# Altium PCB Main.PcbDoc (part 3 of 4)
Units mil, origin at the board's own origin, x right, y up, seen from the top; angles counter-clockwise.
Board outline 16000 x 4900 mil, 4 copper layers (L1-Top, L2-Mid-A, L3-Mid-B, L4-Bottom), stack 285.556 mil thick; 96 components, 105 nets, 278 pads, 8355 vias.
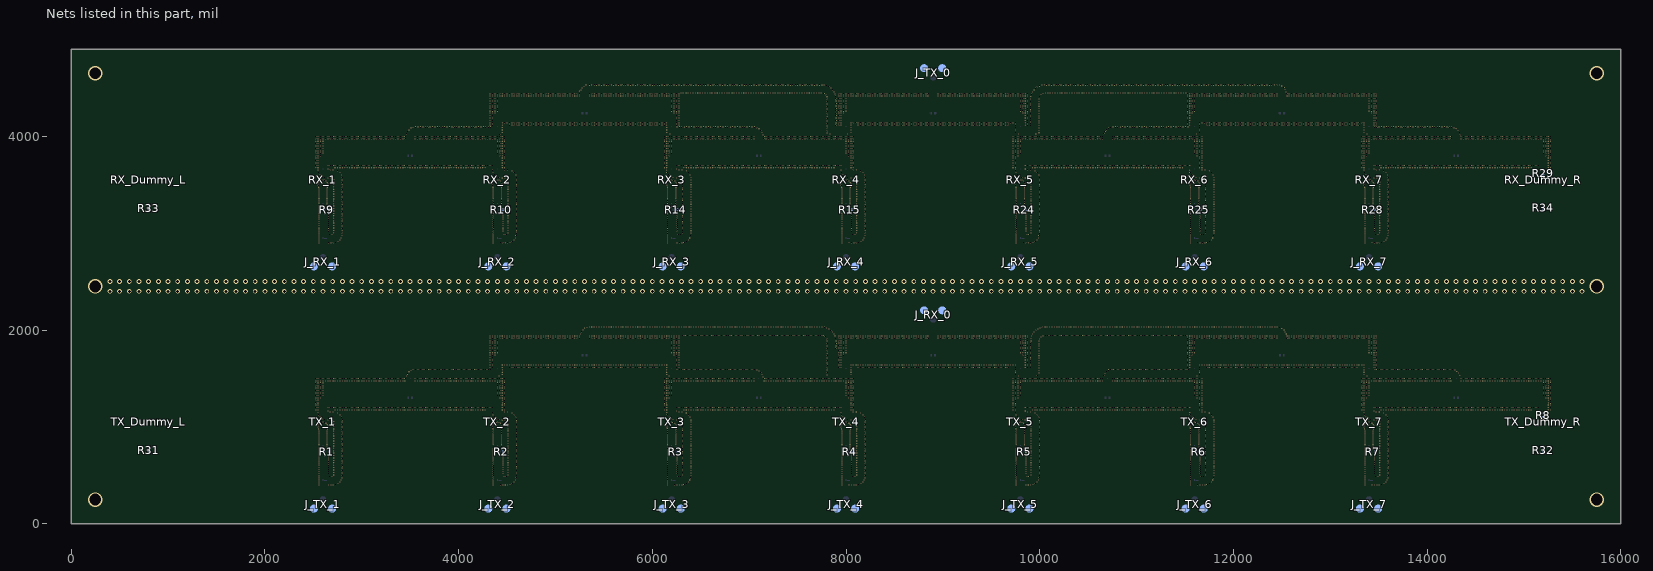
[diagram p5: the nets of this part, all layers, seen from the top]

## Via types
v1: diameter 12, hole 6, L3-Mid-B to L4-Bottom, tented both sides, 5944 vias
v2: diameter 12, hole 6, L3-Mid-B to L4-Bottom, tented bottom, 2081 vias
v3: diameter 50, hole 31, L1-Top to L4-Bottom, tented both sides, 306 vias
v4: diameter 39.37/55.12/55.12 (per signal layer), hole 35.43, L2-Mid-A to L4-Bottom, 18 vias
v5: diameter 150, hole 120, L1-Top to L4-Bottom, 6 vias

## Nets (pads, with @x,y where several pads share a name; then routed paths per layer and width w, separated by ;. In a path a pad name is that pad's centre, name@x,y a point inside that pad or via, vN(x,y) a via of type N, cw(c..) or ccw(c..) an arc to the next point about the centre after c; other vN are vias at no path point) (continued)
GND: (continued)
  other v1: 2525,4000 2550,4000 2575,4000 2600,4000 2625,4000 2650,4000 2675,4000 2700,4000 2725,4000 2750,4000 2775,4000 2800,4000 2825,4000 2850,4000 2875,4000 2900,4000 2925,4000 2950,4000 2975,4000 3000,4000 3025,4000 3050,4000 3075,4000 3100,4000 3125,4000 3150,4000 3175,4000 3200,4000 3225,4000 3250,4000 3275,4000 3300,4000 3325,4000 3350,4000 3375,4000 3400,4000 3425,4000 3450,4000 3550,4000 3575,4000 3600,4000 3625,4000 3650,4000 3675,4000 3700,4000 3725,4000 3750,4000 3775,4000 3800,4000 3825,4000 3850,4000 3875,4000 3900,4000 3925,4000 3950,4000 3975,4000 4000,4000 4025,4000 4050,4000 4075,4000 4100,4000 4125,4000 4150,4000 4175,4000 4200,4000 4225,4000 4250,4000 4275,4000 4300,4000 4325,4000 4350,4000 4375,4000 4400,4000 4425,4000 4450,4000 4475,4000 6125,4000 6150,4000 6175,4000 6200,4000 6225,4000 6250,4000 6275,4000 6300,4000 6325,4000 6350,4000 6375,4000 6400,4000 6425,4000 6450,4000 6475,4000 6500,4000 6525,4000 6550,4000 6575,4000 6600,4000 6625,4000 6650,4000 6675,4000 6700,4000 6725,4000 6750,4000 6775,4000 6800,4000 6825,4000 6850,4000 6875,4000 6900,4000 6925,4000 6950,4000 6975,4000 7000,4000 7025,4000 7050,4000 7150,4000 7175,4000 7200,4000 7225,4000 7250,4000 7275,4000 7300,4000 7325,4000 7350,4000 7375,4000 7400,4000 7425,4000 7450,4000 7475,4000 7500,4000 7525,4000 7550,4000 7575,4000 7600,4000 7625,4000 7650,4000 7675,4000 7700,4000 7725,4000 7750,4000 7775,4000 7800,4000 7825,4000 7850,4000 7875,4000 7900,4000 7925,4000 7950,4000 7975,4000 8000,4000 8025,4000 8050,4000 8075,4000 9725,4000 9750,4000 9775,4000 9800,4000 9825,4000 9850,4000 9875,4000 9900,4000 9925,4000 9950,4000 9975,4000 10000,4000 10025,4000 10050,4000 10075,4000 10100,4000 10125,4000 10150,4000 10175,4000 10200,4000 10225,4000 10250,4000 10275,4000 10300,4000 10325,4000 10350,4000 10375,4000 10400,4000 10425,4000 10450,4000 10475,4000 10500,4000 10525,4000 10550,4000 10575,4000 10600,4000 10625,4000 10650,4000 10750,4000 10775,4000 10800,4000 10825,4000 10850,4000 10875,4000 10900,4000 10925,4000 10950,4000 10975,4000 11000,4000 11025,4000 11050,4000 11075,4000 11100,4000 11125,4000 11150,4000 11175,4000 11200,4000 11225,4000 11250,4000 11275,4000 11300,4000 11325,4000 11350,4000 11375,4000 11400,4000 11425,4000 11450,4000 11475,4000 11500,4000 11525,4000 11550,4000 11575,4000 11600,4000 11625,4000 11650,4000 11675,4000 13325,4000 13350,4000 13375,4000 13400,4000 13425,4000 13450,4000 13475,4000 13500,4000 13525,4000 13550,4000 13575,4000 13600,4000 13625,4000 13650,4000 13675,4000 13700,4000 13725,4000 13750,4000 13775,4000 13800,4000 13825,4000 13850,4000 13875,4000 13900,4000 13925,4000 13950,4000 13975,4000 14000,4000 14025,4000 14050,4000 14075,4000 14100,4000 14125,4000 14150,4000 14175,4000 14200,4000 14225,4000 14250,4000 14350,4000 14375,4000 14400,4000 14425,4000 14450,4000 14475,4000 14500,4000 14525,4000 14550,4000 14575,4000 14600,4000 14625,4000 14650,4000 14675,4000 14700,4000 14725,4000 14750,4000 14775,4000 14800,4000 14825,4000 14850,4000 14875,4000 14900,4000 14925,4000 14950,4000 14975,4000 15000,4000 15025,4000 15050,4000 15075,4000 15100,4000 15125,4000 15150,4000 15175,4000 15200,4000 15225,4000 15250,4000 15275,4000 4425,4020 6180,4025 8015,4025 9780,4025 11620,4025 13380,4025 4450,4040 6150,4040 8050,4040 9750,4040 11650,4040 13350,4040 4450,4065 6150,4065 8050,4065 9750,4065 11650,4065 13350,4065 4450,4090 6150,4090 8050,4090 9750,4090 11650,4090 13350,4090 4325,4115 4350,4115 4450,4115 4525,4115 4550,4115 4575,4115 4600,4115 4625,4115 4650,4115 4675,4115 4700,4115 4725,4115 4750,4115 4775,4115 4800,4115 4825,4115 4850,4115 4875,4115 4900,4115 4925,4115 4950,4115 4975,4115 5000,4115 5025,4115 5050,4115 5075,4115 5100,4115 5125,4115 5150,4115 5175,4115 5200,4115 5225,4115 5250,4115 5275,4115 5300,4115 5325,4115 5350,4115 5375,4115 5400,4115 5425,4115 5450,4115 5475,4115 5500,4115 5525,4115 5550,4115 5575,4115 5600,4115 5625,4115 5650,4115 5675,4115 5700,4115 5725,4115 5750,4115 5775,4115 5800,4115 5825,4115 5850,4115 5875,4115 5900,4115 5925,4115 5950,4115 5975,4115 6000,4115 6025,4115 6050,4115 6075,4115 6100,4115 6125,4115 6150,4115 6250,4115 6275,4115 7925,4115 7950,4115 8050,4115 8125,4115 8150,4115 8175,4115 8200,4115 8225,4115 8250,4115 8275,4115 8300,4115 8325,4115 8350,4115 8375,4115 8400,4115 8425,4115 8450,4115 8475,4115 8500,4115 8525,4115 8550,4115 8575,4115 8600,4115 8625,4115 8650,4115 8675,4115 8700,4115 8725,4115 8750,4115 8775,4115 8800,4115 8825,4115 8850,4115 8875,4115 8900,4115 8925,4115 8950,4115 8975,4115 9000,4115 9025,4115 9050,4115 9075,4115 9100,4115 9125,4115 9150,4115 9175,4115 9200,4115 9225,4115 9250,4115 9275,4115 9300,4115 9325,4115 9350,4115 9375,4115 9400,4115 9425,4115 9450,4115 9475,4115 9500,4115 9525,4115 9550,4115 9575,4115 9600,4115 9625,4115 9650,4115 9675,4115 9750,4115 9850,4115 9875,4115 11525,4115 11550,4115 11650,4115 11725,4115 11750,4115 11775,4115 11800,4115 11825,4115 11850,4115 11875,4115 11900,4115 11925,4115 11950,4115 11975,4115 12000,4115 12025,4115 12050,4115 12075,4115 12100,4115 12125,4115 12150,4115 12175,4115 12200,4115 12225,4115 12250,4115 12275,4115 12300,4115 12325,4115 12350,4115 12375,4115 12400,4115 12425,4115 12450,4115 12475,4115 12500,4115 12525,4115 12550,4115 12575,4115 12600,4115 12625,4115 12650,4115 12675,4115 12700,4115 12725,4115 12750,4115 12775,4115 12800,4115 12825,4115 12850,4115 12875,4115 12900,4115 12925,4115 12950,4115 12975,4115 13000,4115 13025,4115 13050,4115 13075,4115 13100,4115 13125,4115 13150,4115 13175,4115 13200,4115 13225,4115 13250,4115 13275,4115 13300,4115 13350,4115 13450,4115 13475,4115 4325,4140 4350,4140 4450,4140 4475,4140 4500,4140 4525,4140 4550,4140 4575,4140 4600,4140 4625,4140 4650,4140 4675,4140 4700,4140 4725,4140 4750,4140 4775,4140 4800,4140 4825,4140 4850,4140 4875,4140 4900,4140 4925,4140 4950,4140 4975,4140 5000,4140 5025,4140 5050,4140 5075,4140 5100,4140 5125,4140 5150,4140 5175,4140 5200,4140 5225,4140 5250,4140 5275,4140 5300,4140 5325,4140 5350,4140 5375,4140 5400,4140 5425,4140 5450,4140 5475,4140 5500,4140 5525,4140 5550,4140 5575,4140 5600,4140 5625,4140 5650,4140 5675,4140 5700,4140 5725,4140 5750,4140 5775,4140 5800,4140 5825,4140 5850,4140 5875,4140 5900,4140 5925,4140 5950,4140 5975,4140 6000,4140 6025,4140 6050,4140 6075,4140 6100,4140 6125,4140 6150,4140 6250,4140 6275,4140 7925,4140 7950,4140 8050,4140 8075,4140 8100,4140 8125,4140 8150,4140 8175,4140 8200,4140 8225,4140 8250,4140 8275,4140 8300,4140 8325,4140 8350,4140 8375,4140 8400,4140 8425,4140 8450,4140 8475,4140 8500,4140 8525,4140 8550,4140 8575,4140 8600,4140 8625,4140 8650,4140 8675,4140 8700,4140 8725,4140 8750,4140 8775,4140 8800,4140 8825,4140 8850,4140 8875,4140 8900,4140 8925,4140 8950,4140 8975,4140 9000,4140 9025,4140 9050,4140 9075,4140 9100,4140 9125,4140 9150,4140 9175,4140 9200,4140 9225,4140 9250,4140 9275,4140 9300,4140 9325,4140 9350,4140 9375,4140 9400,4140 9425,4140 9450,4140 9475,4140 9500,4140 9525,4140 9550,4140 9575,4140 9600,4140 9625,4140 9650,4140 9675,4140 9700,4140 9725,4140 9750,4140 9850,4140 9875,4140 11525,4140 11550,4140 11650,4140 11675,4140 11700,4140 11725,4140 11750,4140 11775,4140 11800,4140 11825,4140 11850,4140 11875,4140 11900,4140 11925,4140 11950,4140 11975,4140 12000,4140 12025,4140 12050,4140 12075,4140 12100,4140 12125,4140 12150,4140 12175,4140 12200,4140 12225,4140 12250,4140 12275,4140 12300,4140 12325,4140 12350,4140 12375,4140 12400,4140 12425,4140 12450,4140 12475,4140 12500,4140 12525,4140 12550,4140 12575,4140 12600,4140 12625,4140 12650,4140 12675,4140 12700,4140 12725,4140 12750,4140 12775,4140 12800,4140 12825,4140 12850,4140 12875,4140 12900,4140 12925,4140 12950,4140 12975,4140 13000,4140 13025,4140 13050,4140 13075,4140 13100,4140 13125,4140 13150,4140 13175,4140 13200,4140 13225,4140 13250,4140 13275,4140 13300,4140 13325,4140 13350,4140 13450,4140 13475,4140 4325,4165 4350,4165 6250,4165 6275,4165 7925,4165 7950,4165 9850,4165 9875,4165 11525,4165 11550,4165 13450,4165 13475,4165 4325,4190 4350,4190 6250,4190 6275,4190 7925,4190 7950,4190 9850,4190 9875,4190 11525,4190 11550,4190 13450,4190 13475,4190 4325,4215 4350,4215 6250,4215 6275,4215 7925,4215 7950,4215 9850,4215 9875,4215 11525,4215 11550,4215 13450,4215 13475,4215 4325,4240 4350,4240 4375,4240 6225,4240 6250,4240 6275,4240 7925,4240 7950,4240 7975,4240 9825,4240 9850,4240 9875,4240 11525,4240 11550,4240 11575,4240 13425,4240 13450,4240 13475,4240 4325,4265 4350,4265 4375,4265 4400,4265 6200,4265 6225,4265 6250,4265 6275,4265 7925,4265 7950,4265 7975,4265 8000,4265 9800,4265 9825,4265 9850,4265 9875,4265 11525,4265 11550,4265 11575,4265 11600,4265 13400,4265 13425,4265 13450,4265 13475,4265 4325,4290 4350,4290 4375,4290 4400,4290 6200,4290 6225,4290 6250,4290 6275,4290 7925,4290 7950,4290 7975,4290 8000,4290 9800,4290 9825,4290 9850,4290 9875,4290 11525,4290 11550,4290 11575,4290 11600,4290 13400,4290 13425,4290 13450,4290 13475,4290 4325,4315 4350,4315 4375,4315 4400,4315 6200,4315 6225,4315 6250,4315 6275,4315 7925,4315 7950,4315 7975,4315 8000,4315 9800,4315 9825,4315 9850,4315 9875,4315 11525,4315 11550,4315 11575,4315 11600,4315 13400,4315 13425,4315 13450,4315 13475,4315 4325,4340 4350,4340 4375,4340 4400,4340 6200,4340 6225,4340 6250,4340 6275,4340 7925,4340 7950,4340 7975,4340 8000,4340 9800,4340 9825,4340 9850,4340 9875,4340 11525,4340 11550,4340 11575,4340 11600,4340 13400,4340 13425,4340 13450,4340 13475,4340 4325,4365 4350,4365 4375,4365 4400,4365 6200,4365 6225,4365 6250,4365 6275,4365 7925,4365 7950,4365 7975,4365 8000,4365 9800,4365 9825,4365 9850,4365 9875,4365 11525,4365 11550,4365 11575,4365 11600,4365 13400,4365 13425,4365 13450,4365 13475,4365 4325,4390 4350,4390 4375,4390 4400,4390 6200,4390 6225,4390 6250,4390 6275,4390 7925,4390 7950,4390 7975,4390 8000,4390 9800,4390 9825,4390 9850,4390 9875,4390 11525,4390 11550,4390 11575,4390 11600,4390 13400,4390 13425,4390 13450,4390 13475,4390 4325,4415 4350,4415 4375,4415 4400,4415 4425,4415 4450,4415 4475,4415 4500,4415 4525,4415 4550,4415 4575,4415 4600,4415 4625,4415 4650,4415 4675,4415 4700,4415 4725,4415 4750,4415 4775,4415 4800,4415 4825,4415 4850,4415 4875,4415 4900,4415 4925,4415 4950,4415 4975,4415 5000,4415 5025,4415 5050,4415 5075,4415 5100,4415 5125,4415 5150,4415 5175,4415 5200,4415 5225,4415 5250,4415 5350,4415 5375,4415 5400,4415 5425,4415 5450,4415 5475,4415 5500,4415 5525,4415 5550,4415 5575,4415 5600,4415 5625,4415 5650,4415 5675,4415 5700,4415 5725,4415 5750,4415 5775,4415 5800,4415 5825,4415 5850,4415 5875,4415 5900,4415 5925,4415 5950,4415 5975,4415 6000,4415 6025,4415 6050,4415 6075,4415 6100,4415 6125,4415 6150,4415 6175,4415 6200,4415 6225,4415 6250,4415 6275,4415 7925,4415 7950,4415 7975,4415 8000,4415 8025,4415 8050,4415 8075,4415 8100,4415 8125,4415 8150,4415 8175,4415 8200,4415 8225,4415 8250,4415 8275,4415 8300,4415 8325,4415 8350,4415 8375,4415 8400,4415 8425,4415 8450,4415 8475,4415 8500,4415 8525,4415 8550,4415 8575,4415 8600,4415 8625,4415 8650,4415 8675,4415 8700,4415 8725,4415 8750,4415 8775,4415 8800,4415 8825,4415 8850,4415 8950,4415 8975,4415 9000,4415 9025,4415 9050,4415 9075,4415 9100,4415 9125,4415 9150,4415 9175,4415 9200,4415 9225,4415 9250,4415 9275,4415 9300,4415 9325,4415 9350,4415 9375,4415 9400,4415 9425,4415 9450,4415 9475,4415 9500,4415 9525,4415 9550,4415 9575,4415 9600,4415 9625,4415 9650,4415 9675,4415 9700,4415 9725,4415 9750,4415 9775,4415 9800,4415 9825,4415 9850,4415 9875,4415 11525,4415 11550,4415 11575,4415 11600,4415 11625,4415 11650,4415 11675,4415 11700,4415 11725,4415 11750,4415 11775,4415 11800,4415 11825,4415 11850,4415 11875,4415 11900,4415 11925,4415 11950,4415 11975,4415 12000,4415 12025,4415 12050,4415 12075,4415 12100,4415 12125,4415 12150,4415 12175,4415 12200,4415 12225,4415 12250,4415 12275,4415 12300,4415 12325,4415 12350,4415 12375,4415 12400,4415 12425,4415 12450,4415 12550,4415 12575,4415 12600,4415 12625,4415 12650,4415 12675,4415 12700,4415 12725,4415 12750,4415 12775,4415 12800,4415 12825,4415 12850,4415 12875,4415 12900,4415 12925,4415 12950,4415 12975,4415 13000,4415 13025,4415 13050,4415 13075,4415 13100,4415 13125,4415 13150,4415 13175,4415 13200,4415 13225,4415 13250,4415 13275,4415 13300,4415 13325,4415 13350,4415 13375,4415 13400,4415 13425,4415 13450,4415 13475,4415 4325,4440 4350,4440 4375,4440 4400,4440 4425,4440 4450,4440 4475,4440 4500,4440 4525,4440 4550,4440 4575,4440 4600,4440 4625,4440 4650,4440 4675,4440 4700,4440 4725,4440 4750,4440 4775,4440 4800,4440 4825,4440 4850,4440 4875,4440 4900,4440 4925,4440 4950,4440 4975,4440 5000,4440 5025,4440 5050,4440 5075,4440 5100,4440 5125,4440 5150,4440 5175,4440 5200,4440 5225,4440 5250,4440 5350,4440 5375,4440 5400,4440 5425,4440 5450,4440 5475,4440 5500,4440 5525,4440 5550,4440 5575,4440 5600,4440 5625,4440 5650,4440 5675,4440 5700,4440 5725,4440 5750,4440 5775,4440 5800,4440 5825,4440 5850,4440 5875,4440 5900,4440 5925,4440 5950,4440 5975,4440 6000,4440 6025,4440 6050,4440 6075,4440 6100,4440 6125,4440 6150,4440 6175,4440 6200,4440 6225,4440 6250,4440 6275,4440 7925,4440 7950,4440 7975,4440 8000,4440 8025,4440 8050,4440 8075,4440 8100,4440 8125,4440 8150,4440 8175,4440 8200,4440 8225,4440 8250,4440 8275,4440 8300,4440 8325,4440 8350,4440 8375,4440 8400,4440 8425,4440 8450,4440 8475,4440 8500,4440 8525,4440 8550,4440 8575,4440 8600,4440 8625,4440 8650,4440 8675,4440 8700,4440 8725,4440 8750,4440 8775,4440 8800,4440 8825,4440 8850,4440 8950,4440 8975,4440 9000,4440 9025,4440 9050,4440 9075,4440 9100,4440 9125,4440 9150,4440 9175,4440 9200,4440 9225,4440 9250,4440 9275,4440 9300,4440 9325,4440 9350,4440 9375,4440 9400,4440 9425,4440 9450,4440 9475,4440 9500,4440 9525,4440 9550,4440 9575,4440 9600,4440 9625,4440 9650,4440 9675,4440 9700,4440 9725,4440 9750,4440 9775,4440 9800,4440 9825,4440 9850,4440 9875,4440 11525,4440 11550,4440 11575,4440 11600,4440 11625,4440 11650,4440 11675,4440 11700,4440 11725,4440 11750,4440 11775,4440 11800,4440 11825,4440 11850,4440 11875,4440 11900,4440 11925,4440 11950,4440 11975,4440 12000,4440 12025,4440 12050,4440 12075,4440 12100,4440 12125,4440 12150,4440 12175,4440 12200,4440 12225,4440 12250,4440 12275,4440 12300,4440 12325,4440 12350,4440 12375,4440 12400,4440 12425,4440 12450,4440 12550,4440 12575,4440 12600,4440 12625,4440 12650,4440 12675,4440 12700,4440 12725,4440 12750,4440 12775,4440 12800,4440 12825,4440 12850,4440 12875,4440 12900,4440 12925,4440 12950,4440 12975,4440 13000,4440 13025,4440 13050,4440 13075,4440 13100,4440 13125,4440 13150,4440 13175,4440 13200,4440 13225,4440 13250,4440 13275,4440 13300,4440 13325,4440 13350,4440 13375,4440 13400,4440 13425,4440 13450,4440 13475,4440
  other v2: 2655.93,401.28 2680.93,401.28 2705.93,401.32 4455.93,401.28 4480.93,401.28 4505.93,401.32 6255.93,401.28 6280.93,401.28 6305.93,401.32 8055.93,401.28 8080.93,401.28 8105.93,401.32 9855.93,401.28 9880.93,401.28 9905.93,401.32 11655.93,401.28 11680.93,401.28 11705.93,401.32 13455.93,401.28 13480.93,401.28 13505.93,401.32 4430.97,402.66 6230.97,402.66 8030.97,402.66 11630.97,402.66 13430.97,402.66 2730.65,405.11 4530.65,405.11 6330.65,405.11 8130.65,405.11 9930.65,405.11 11730.65,405.11 13530.65,405.11 2753.55,415.14 4553.55,415.14 6353.55,415.14 8153.55,415.14 9953.55,415.14 11753.55,415.14 13553.55,415.14 2772.96,430.89 4572.96,430.89 6372.96,430.89 8172.96,430.89 9972.96,430.89 11772.96,430.89 13572.96,430.89 2787.49,451.24 4587.49,451.24 6387.49,451.24 8187.49,451.24 9987.49,451.24 11787.49,451.24 13587.49,451.24 2796.1,474.71 4596.1,474.71 6396.1,474.71 8196.1,474.71 9996.1,474.71 11796.1,474.71 13596.1,474.71 2667.59,488.12 2692.59,488.12 4467.59,488.12 4492.59,488.12 6267.59,488.12 6292.59,488.12 8067.59,488.12 8092.59,488.12 9867.59,488.12 9892.59,488.12 11667.59,488.12 11692.59,488.12 13467.59,488.12 13492.59,488.12 2798.42,499.6 4598.42,499.6 6398.42,499.6 8198.42,499.6 9998.42,499.6 11798.42,499.6 13598.42,499.6 2711.58,504.37 4511.58,504.37 6311.58,504.37 8111.58,504.37 9911.58,504.37 11711.58,504.37 13511.58,504.37 2798.42,524.6 4598.42,524.6 6398.42,524.6 8198.42,524.6 9998.42,524.6 11798.42,524.6 13598.42,524.6 2711.58,529.37 4511.58,529.37 6311.58,529.37 8111.58,529.37 9911.58,529.37 11711.58,529.37 13511.58,529.37 2798.42,549.6 4598.42,549.6 6398.42,549.6 8198.42,549.6 9998.42,549.6 11798.42,549.6 13598.42,549.6 2711.58,554.37 4511.58,554.37 6311.58,554.37 8111.58,554.37 9911.58,554.37 11711.58,554.37 13511.58,554.37 2798.42,574.6 4598.42,574.6 6398.42,574.6 8198.42,574.6 9998.42,574.6 11798.42,574.6 13598.42,574.6 2711.58,579.37 4511.58,579.37 6311.58,579.37 8111.58,579.37 9911.58,579.37 11711.58,579.37 13511.58,579.37 2798.42,599.6 4598.42,599.6 6398.42,599.6 8198.42,599.6 9998.42,599.6 11798.42,599.6 13598.42,599.6 2711.58,604.37 4511.58,604.37 6311.58,604.37 8111.58,604.37 9911.58,604.37 11711.58,604.37 13511.58,604.37 2798.42,624.6 4598.42,624.6 6398.42,624.6 8198.42,624.6 9998.42,624.6 11798.42,624.6 13598.42,624.6 2711.58,629.37 4511.58,629.37 6311.58,629.37 8111.58,629.37 9911.58,629.37 11711.58,629.37 13511.58,629.37 2798.42,649.6 4598.42,649.6 6398.42,649.6 8198.42,649.6 9998.42,649.6 11798.42,649.6 13598.42,649.6 2711.58,654.37 4511.58,654.37 6311.58,654.37 8111.58,654.37 9911.58,654.37 11711.58,654.37 13511.58,654.37 2798.42,674.6 4598.42,674.6 6398.42,674.6 8198.42,674.6 9998.42,674.6 11798.42,674.6 13598.42,674.6 2711.58,679.37 4511.58,679.37 6311.58,679.37 8111.58,679.37 9911.58,679.37 11711.58,679.37 13511.58,679.37 2798.42,699.6 4598.42,699.6 6398.42,699.6 8198.42,699.6 9998.42,699.6 11798.42,699.6 13598.42,699.6 2711.58,704.37 4511.58,704.37 6311.58,704.37 8111.58,704.37 9911.58,704.37 11711.58,704.37 13511.58,704.37 2798.42,724.6 4598.42,724.6 6398.42,724.6 8198.42,724.6 9998.42,724.6 11798.42,724.6 13598.42,724.6 2711.58,729.37 4511.58,729.37 6311.58,729.37 8111.58,729.37 9911.58,729.37 11711.58,729.37 13511.58,729.37 2798.42,749.6 4598.42,749.6 6398.42,749.6 8198.42,749.6 9998.42,749.6 11798.42,749.6 13598.42,749.6 2711.58,754.37 4511.58,754.37 6311.58,754.37 8111.58,754.37 9911.58,754.37 11711.58,754.37 13511.58,754.37 2798.42,774.6 4598.42,774.6 6398.42,774.6 8198.42,774.6 9998.42,774.6 11798.42,774.6 13598.42,774.6 2711.58,779.37 4511.58,779.37 6311.58,779.37 8111.58,779.37 9911.58,779.37 11711.58,779.37 13511.58,779.37 2798.42,799.6 4598.42,799.6 6398.42,799.6 8198.42,799.6 9998.42,799.6 11798.42,799.6 13598.42,799.6 2711.58,804.37 4511.58,804.37 6311.58,804.37 8111.58,804.37 9911.58,804.37 11711.58,804.37 13511.58,804.37 2798.42,824.6 4598.42,824.6 6398.42,824.6 8198.42,824.6 9998.42,824.6 11798.42,824.6 13598.42,824.6 2711.58,829.37 4511.58,829.37 6311.58,829.37 8111.58,829.37 9911.58,829.37 11711.58,829.37 13511.58,829.37 2798.42,849.6 4598.42,849.6 6398.42,849.6 8198.42,849.6 9998.42,849.6 11798.42,849.6 13598.42,849.6 2711.58,854.37 4511.58,854.37 6311.58,854.37 8111.58,854.37 9911.58,854.37 11711.58,854.37 13511.58,854.37 2798.42,874.6 4598.42,874.6 6398.42,874.6 8198.42,874.6 9998.42,874.6 11798.42,874.6 13598.42,874.6 2711.58,879.37 4511.58,879.37 6311.58,879.37 8111.58,879.37 9911.58,879.37 11711.58,879.37 13511.58,879.37 2798.42,899.6 4598.42,899.6 6398.42,899.6 8198.42,899.6 9998.42,899.6 11798.42,899.6 13598.42,899.6 2711.58,904.37 4511.58,904.37 6311.58,904.37 8111.58,904.37 9911.58,904.37 11711.58,904.37 13511.58,904.37 2798.42,924.6 4598.42,924.6 6398.42,924.6 8198.42,924.6 9998.42,924.6 11798.42,924.6 13598.42,924.6 2711.58,929.37 4511.58,929.37 6311.58,929.37 8111.58,929.37 9911.58,929.37 11711.58,929.37 13511.58,929.37 2798.42,949.6 4598.42,949.6 6398.42,949.6 8198.42,949.6 9998.42,949.6 11798.42,949.6 13598.42,949.6 2711.58,954.37 4511.58,954.37 6311.58,954.37 8111.58,954.37 9911.58,954.37 11711.58,954.37 13511.58,954.37 2798.42,974.6 4598.42,974.6 6398.42,974.6 8198.42,974.6 9998.42,974.6 11798.42,974.6 13598.42,974.6 2711.58,979.37 4511.58,979.37 6311.58,979.37 8111.58,979.37 9911.58,979.37 11711.58,979.37 13511.58,979.37 2798.42,999.6 4598.42,999.6 6398.42,999.6 8198.42,999.6 9998.42,999.6 11798.42,999.6 13598.42,999.6 2711.58,1004.37 4511.58,1004.37 6311.58,1004.37 8111.58,1004.37 9911.58,1004.37 11711.58,1004.37 13511.58,1004.37 2798.42,1024.6 4598.42,1024.6 6398.42,1024.6 8198.42,1024.6 9998.42,1024.6 11798.42,1024.6 13598.42,1024.6 2711.58,1029.37 4511.58,1029.37 6311.58,1029.37 8111.58,1029.37 9911.58,1029.37 11711.58,1029.37 13511.58,1029.37 2798.42,1049.6 4598.42,1049.6 6398.42,1049.6 8198.42,1049.6 9998.42,1049.6 11798.42,1049.6 13598.42,1049.6 2711.58,1054.37 4511.58,1054.37 6311.58,1054.37 8111.58,1054.37 9911.58,1054.37 11711.58,1054.37 13511.58,1054.37 2650,1070 2680,1070 4450,1070 4480,1070 6250,1070 6280,1070 8050,1070 8080,1070 9850,1070 9880,1070 11650,1070 11680,1070 13450,1070 13480,1070 2615,1075 2798.42,1074.6 4415,1075 4598.42,1074.6 6215,1075 6398.42,1074.6 8015,1075 8198.42,1074.6 9815,1075 9998.42,1074.6 11615,1075 11798.42,1074.6 13415,1075 13598.42,1074.6 2590,1085 4390,1085 6190,1085 7990,1085 9790,1085 11590,1085 13390,1085 2790,1100 4590,1100 6390,1100 8190,1100 9990,1100 11790,1100 13590,1100 2570,1105 4370,1105 6170,1105 7970,1105 9770,1105 11570,1105 13370,1105 2555,1125 2775,1125 4355,1125 4575,1125 6155,1125 6375,1125 7955,1125 8175,1125 9755,1125 9975,1125 11555,1125 11775,1125 13355,1125 13575,1125 2750,1145 4550,1145 6350,1145 8150,1145 9950,1145 11750,1145 13550,1145 2550,1150 4350,1150 6150,1150 7950,1150 9750,1150 11550,1150 13350,1150 2675,1155 2705,1155 4475,1155 4505,1155 6275,1155 6305,1155 8075,1155 8105,1155 9875,1155 9905,1155 11675,1155 11705,1155 13475,1155 13505,1155 2650,1162.6 6250,1162.6 9850,1162.6 13450,1162.6 7141.63,1516.7 9780,1525 3460.68,1526.63 10661.47,1529.35 9975,1530 14336.54,1534.18 7806.58,1536.01 7133.92,1540.49 8050,1540 9750,1540 3470.95,1549.42 10672.48,1551.79 14324.3,1555.98 9993.42,1558.94 7120.17,1561.37 7806.58,1561.01 8050,1565 9750,1565 3486.9,1568.67 10689.07,1570.5 14306.71,1573.74 7101.37,1577.84 3507.39,1582.99 9993.42,1583.94 10710.02,1584.13 7806.58,1586.01 14285.03,1586.18 7078.86,1588.72 8050,1590 9750,1590 3530.96,1591.32 10733.85,1591.7 14260.82,1592.41 3555.87,1593.42 3580.87,1593.42 3605.87,1593.42 3630.87,1593.42 3655.87,1593.42 3680.87,1593.42 3705.87,1593.42 3730.87,1593.42 3755.87,1593.42 3780.87,1593.42 3805.87,1593.42 3830.87,1593.42 3855.87,1593.42 3880.87,1593.42 3905.87,1593.42 3930.87,1593.42 3955.87,1593.42 3980.87,1593.42 4005.87,1593.42 4030.87,1593.42 4055.87,1593.42 4080.87,1593.42 4105.87,1593.42 4130.87,1593.42 4155.87,1593.42 4180.87,1593.42 4205.87,1593.42 4230.87,1593.42 4255.87,1593.42 4280.87,1593.42 4305.87,1593.42 4330.87,1593.42 6254.26,1593.41 6279.26,1593.41 6304.26,1593.41 6329.26,1593.41 6354.26,1593.41 6379.26,1593.41 6404.26,1593.41 6429.26,1593.41 6454.26,1593.41 6479.26,1593.41 6504.26,1593.41 6529.26,1593.41 6554.26,1593.41 6579.26,1593.41 6604.26,1593.41 6629.26,1593.41 6654.26,1593.41 6679.26,1593.41 6704.26,1593.41 6729.26,1593.41 6754.26,1593.41 6779.26,1593.41 6804.26,1593.41 6829.26,1593.41 6854.26,1593.41 6879.26,1593.41 6904.26,1593.41 6929.26,1593.41 6954.26,1593.41 6979.26,1593.41 7004.26,1593.41 7029.26,1593.41 7054.26,1593.17 10758.79,1593.42 10783.79,1593.42 10808.79,1593.42 10833.79,1593.42 10858.79,1593.42 10883.79,1593.42 10908.79,1593.42 10933.79,1593.42 10958.79,1593.42 10983.79,1593.42 11008.79,1593.42 11033.79,1593.42 11058.79,1593.42 11083.79,1593.42 11108.79,1593.42 11133.79,1593.42 11158.79,1593.42 11183.79,1593.42 11208.79,1593.42 11233.79,1593.42 11258.79,1593.42 11283.79,1593.42 11308.79,1593.42 11333.79,1593.42 11358.79,1593.42 11383.79,1593.42 11408.79,1593.42 11433.79,1593.42 11458.79,1593.42 11483.79,1593.42 11508.79,1593.42 11533.79,1593.42 13460.84,1593.42 13485.84,1593.42 13510.84,1593.42 13535.84,1593.42 13560.84,1593.42 13585.84,1593.42 13610.84,1593.42 13635.84,1593.42 13660.84,1593.42 13685.84,1593.42 13710.84,1593.42 13735.84,1593.42 13760.84,1593.42 13785.84,1593.42 13810.84,1593.42 13835.84,1593.42 13860.84,1593.42 13885.84,1593.42 13910.84,1593.42 13935.84,1593.42 13960.84,1593.42 13985.84,1593.42 14010.84,1593.42 14035.84,1593.42 14060.84,1593.42 14085.84,1593.42 14110.84,1593.42 14135.84,1593.42 14160.84,1593.42 14185.84,1593.42 14210.84,1593.42 14235.84,1593.42 9993.42,1608.94 7806.58,1611.01 9906.58,1613.42 8050,1615 9750,1615 9993.42,1633.94 7806.58,1636.01 9906.58,1638.42 9993.42,1658.94 7806.58,1661.01 9906.58,1663.42 9993.42,1683.94 7806.58,1686.01 9906.58,1688.42 9993.42,1708.94 7806.58,1711.01 9906.58,1713.42 9993.42,1733.94 7806.58,1736.01 9906.58,1738.42 9993.42,1758.94 7806.58,1761.01 9906.58,1763.42 9993.42,1783.94 7806.58,1786.01 9906.58,1788.42 9993.42,1808.94 7806.58,1811.01 7893.42,1811.33 9906.58,1813.42 9993.42,1833.94 7806.58,1836.01 7893.42,1836.33 9906.58,1838.42 9993.42,1858.94 7806.58,1861.01 7893.42,1861.33 9906.58,1863.42 9993.42,1883.94 7806.58,1886.01 7893.42,1886.33 9906.72,1888.42 9997.42,1908.61 7801.67,1910.53 7891.16,1911.23 9909.13,1913.3 10011.78,1929.08 7786.56,1930.44 7884.91,1935.43 9915.89,1937.37 10033.52,1941.41 7764.41,1942.04 6314.49,1943.98 6339.49,1943.98 6364.49,1943.98 6389.49,1943.98 6414.49,1943.98 6439.49,1943.98 6464.49,1943.98 6489.49,1943.98 6514.49,1943.98 6539.49,1943.98 6564.49,1943.98 6589.49,1943.98 6614.49,1943.98 6639.49,1943.98 6664.49,1943.98 6689.49,1943.98 6714.49,1943.98 6739.49,1943.98 6764.49,1943.98 6789.49,1943.98 6814.49,1943.98 6839.49,1943.98 6864.49,1943.98 6889.49,1943.98 6914.49,1943.98 6939.49,1943.98 6964.49,1943.98 6989.49,1943.98 7014.49,1943.98 7039.49,1943.98 7064.49,1943.98 7089.49,1943.98 7114.49,1943.98 7139.49,1943.98 7164.49,1943.98 7189.49,1943.98 7214.49,1943.98 7239.49,1943.98 7264.49,1943.98 7289.49,1943.98 7314.49,1943.98 7339.49,1943.98 7364.49,1943.98 7389.49,1943.98 7414.49,1943.98 7439.49,1943.98 7464.49,1943.98 7489.49,1943.98 7514.49,1943.98 7539.49,1943.98 7564.49,1943.98 7589.49,1943.98 7614.49,1943.98 7639.49,1943.98 7664.49,1943.98 7689.49,1943.98 7714.49,1943.98 7739.49,1943.98 10058.39,1943.98 10083.39,1943.98 10108.39,1943.98 10133.39,1943.98 10158.39,1943.98 10183.39,1943.98 10208.39,1943.98 10233.39,1943.98 10258.39,1943.98 10283.39,1943.98 10308.39,1943.98 10333.39,1943.98 10358.39,1943.98 10383.39,1943.98 10408.39,1943.98 10433.39,1943.98 10458.39,1943.98 10483.39,1943.98 10508.39,1943.98 10533.39,1943.98 10558.39,1943.98 10583.39,1943.98 10608.39,1943.98 10633.39,1943.98 10658.39,1943.98 10683.39,1943.98 10708.39,1943.98 10733.39,1943.98 10758.39,1943.98 10783.39,1943.98 10808.39,1943.98 10833.39,1943.98 10858.39,1943.98 10883.39,1943.98 10908.39,1943.98 10933.39,1943.98 10958.39,1943.98 10983.39,1943.98 11008.39,1943.98 11033.39,1943.98 11058.39,1943.98 11083.39,1943.98 11108.39,1943.98 11133.39,1943.98 11158.39,1943.98 11183.39,1943.98 11208.39,1943.98 11233.39,1943.98 11258.39,1943.98 11283.39,1943.98 11308.39,1943.98 11333.39,1943.98 11358.39,1943.98 11383.39,1943.98 11408.39,1943.98 11433.39,1943.98 11458.39,1943.98 11483.39,1943.98 11508.39,1943.98 7874.41,1958.12 5259.47,1959.51 9926.69,1959.92 12545,1960 7860.15,1978.66 9941.22,1980.26 12533.24,1979.52 5268.62,1982.78 7842.57,1996.43 9959.04,1997.8 12519.06,2000.1 5283.62,2002.78 7822.19,2010.91 9979.61,2012.01 12499.9,2016.17 5303.39,2018.07 7799.62,2021.66 10002.32,2022.46 12477.17,2026.57 5326.52,2027.56 7775.53,2028.36 10026.55,2028.6 5350.64,2030.81 5375.64,2030.81 5400.64,2030.81 5425.64,2030.81 5450.64,2030.81 5475.64,2030.81 5500.64,2030.81 5525.64,2030.81 5550.64,2030.81 5575.64,2030.81 5600.64,2030.81 5625.64,2030.81 5650.64,2030.81 5675.64,2030.81 5700.64,2030.81 5725.64,2030.81 5750.64,2030.81 5775.64,2030.81 5800.64,2030.81 5825.64,2030.81 5850.64,2030.81 5875.64,2030.81 5900.64,2030.81 5925.64,2030.81 5950.64,2030.81 5975.64,2030.81 6000.64,2030.81 6025.64,2030.81 6050.64,2030.81 6075.64,2030.81 6100.64,2030.81 6125.64,2030.81 6150.64,2030.81 6175.64,2030.81 6200.64,2030.81 6225.64,2030.81 6250.64,2030.81 6275.64,2030.81 6300.64,2030.81 6325.64,2030.81 6350.64,2030.81 6375.64,2030.81 6400.64,2030.81 6425.64,2030.81 6450.64,2030.81 6475.64,2030.81 6500.64,2030.81 6525.64,2030.81 6550.64,2030.81 6575.64,2030.81 6600.64,2030.81 6625.64,2030.81 6650.64,2030.81 6675.64,2030.81 6700.64,2030.81 6725.64,2030.81 6750.64,2030.81 6775.64,2030.81 6800.64,2030.81 6825.64,2030.81 6850.64,2030.81 6875.64,2030.81 6900.64,2030.81 6925.64,2030.81 6950.64,2030.81 6975.64,2030.81 7000.64,2030.81 7025.64,2030.81 7050.64,2030.81 7075.64,2030.81 7100.64,2030.81 7125.64,2030.81 7150.64,2030.81 7175.64,2030.81 7200.64,2030.81 7225.64,2030.81 7250.64,2030.81 7275.64,2030.81 7300.64,2030.81 7325.64,2030.81 7350.64,2030.81 7375.64,2030.81 7400.64,2030.81 7425.64,2030.81 7450.64,2030.81 7475.64,2030.81 7500.64,2030.81 7525.64,2030.81 7550.64,2030.81 7575.64,2030.81 7600.64,2030.81 7625.64,2030.81 7650.64,2030.81 7675.64,2030.81 7700.64,2030.81 7725.64,2030.81 7750.64,2030.73 10051.45,2030.81 10076.45,2030.81 10101.45,2030.81 10126.45,2030.81 10151.45,2030.81 10176.45,2030.81 10201.45,2030.81 10226.45,2030.81 10251.45,2030.81 10276.45,2030.81 10301.45,2030.81 10326.45,2030.81 10351.45,2030.81 10376.45,2030.81 10401.45,2030.81 10426.45,2030.81 10451.45,2030.81 10476.45,2030.81 10501.45,2030.81 10526.45,2030.81 10551.45,2030.81 10576.45,2030.81 10601.45,2030.81 10626.45,2030.81 10651.45,2030.81 10676.45,2030.81 10701.45,2030.81 10726.45,2030.81 10751.45,2030.81 10776.45,2030.81 10801.45,2030.81 10826.45,2030.81 10851.45,2030.81 10876.45,2030.81 10901.45,2030.81 10926.45,2030.81 10951.45,2030.81 10976.45,2030.81 11001.45,2030.81 11026.45,2030.81 11051.45,2030.81 11076.45,2030.81 11101.45,2030.81 11126.45,2030.81 11151.45,2030.81 11176.45,2030.81 11201.45,2030.81 11226.45,2030.81 11251.45,2030.81 11276.45,2030.81 11301.45,2030.81 11326.45,2030.81 11351.45,2030.81 11376.45,2030.81 11401.45,2030.81 11426.45,2030.81 11451.45,2030.81 11476.45,2030.81 11501.45,2030.81 11526.45,2030.81 11551.45,2030.81 11576.45,2030.81 11601.45,2030.81 11626.45,2030.81 11651.45,2030.81 11676.45,2030.81 11701.45,2030.81 11726.45,2030.81 11751.45,2030.81 11776.45,2030.81 11801.45,2030.81 11826.45,2030.81 11851.45,2030.81 11876.45,2030.81 11901.45,2030.81 11926.45,2030.81 11951.45,2030.81 11976.45,2030.81 12001.45,2030.81 12026.45,2030.81 12051.45,2030.81 12076.45,2030.81 12101.45,2030.81 12126.45,2030.81 12151.45,2030.81 12176.45,2030.81 12201.45,2030.81 12226.45,2030.81 12251.45,2030.81 12276.45,2030.81 12301.45,2030.81 12326.45,2030.81 12351.45,2030.81 12376.45,2030.81 12401.45,2030.81 12426.45,2030.81 12452.49,2030.57 2655.93,2901.28 2680.93,2901.28 2705.93,2901.32 4455.93,2901.28 4480.93,2901.28 4505.93,2901.32 6255.93,2901.28 6280.93,2901.28 6305.93,2901.32 8055.93,2901.28 8080.93,2901.28 8105.93,2901.32 9855.93,2901.28 9880.93,2901.28 9905.93,2901.32 11655.93,2901.28 11680.93,2901.28 11705.93,2901.32 13455.93,2901.28 13480.93,2901.28 13505.93,2901.32 4430.97,2902.66 8030.97,2902.66 9830.97,2902.66 11630.97,2902.66 13430.97,2902.66 2730.65,2905.11 4530.65,2905.11 6330.65,2905.11 8130.65,2905.11 9930.65,2905.11 11730.65,2905.11 13530.65,2905.11 2753.55,2915.14 4553.55,2915.14 6353.55,2915.14 8153.55,2915.14 9953.55,2915.14 11753.55,2915.14 13553.55,2915.14 2772.96,2930.89 4572.96,2930.89 6372.96,2930.89 8172.96,2930.89 9972.96,2930.89 11772.96,2930.89 13572.96,2930.89 2787.49,2951.24 4587.49,2951.24 6387.49,2951.24 8187.49,2951.24 9987.49,2951.24 11787.49,2951.24 13587.49,2951.24 2796.1,2974.71 4596.1,2974.71 6396.1,2974.71 8196.1,2974.71 9996.1,2974.71 11796.1,2974.71 13596.1,2974.71 2667.59,2988.12 2692.59,2988.12 4467.59,2988.12 4492.59,2988.12 6267.59,2988.12 6292.59,2988.12 8067.59,2988.12 8092.59,2988.12 9867.59,2988.12 9892.59,2988.12 11667.59,2988.12 11692.59,2988.12 13467.59,2988.12 13492.59,2988.12 2798.42,2999.6 4598.42,2999.6 6398.42,2999.6 8198.42,2999.6 9998.42,2999.6 11798.42,2999.6 13598.42,2999.6 2711.58,3004.37 4511.58,3004.37 6311.58,3004.37 8111.58,3004.37 9911.58,3004.37 11711.58,3004.37 13511.58,3004.37 2798.42,3024.6 4598.42,3024.6 6398.42,3024.6 8198.42,3024.6 9998.42,3024.6 11798.42,3024.6 13598.42,3024.6 2711.58,3029.37 4511.58,3029.37 6311.58,3029.37 8111.58,3029.37 9911.58,3029.37 11711.58,3029.37 13511.58,3029.37 2798.42,3049.6 4598.42,3049.6 6398.42,3049.6 8198.42,3049.6 9998.42,3049.6 11798.42,3049.6 13598.42,3049.6 2711.58,3054.37 4511.58,3054.37 6311.58,3054.37 8111.58,3054.37 9911.58,3054.37 11711.58,3054.37 13511.58,3054.37 2798.42,3074.6 4598.42,3074.6 6398.42,3074.6 8198.42,3074.6 9998.42,3074.6 11798.42,3074.6 13598.42,3074.6 2711.58,3079.37 4511.58,3079.37 6311.58,3079.37 8111.58,3079.37 9911.58,3079.37 11711.58,3079.37 13511.58,3079.37 2798.42,3099.6 4598.42,3099.6 6398.42,3099.6 8198.42,3099.6 9998.42,3099.6 11798.42,3099.6 13598.42,3099.6 2711.58,3104.37 4511.58,3104.37 6311.58,3104.37 8111.58,3104.37 9911.58,3104.37 11711.58,3104.37 13511.58,3104.37 2798.42,3124.6 4598.42,3124.6 6398.42,3124.6 8198.42,3124.6 9998.42,3124.6 11798.42,3124.6 13598.42,3124.6 2711.58,3129.37 4511.58,3129.37 6311.58,3129.37 8111.58,3129.37 9911.58,3129.37 11711.58,3129.37 13511.58,3129.37 2798.42,3149.6 4598.42,3149.6 6398.42,3149.6 8198.42,3149.6 9998.42,3149.6 11798.42,3149.6 13598.42,3149.6 2711.58,3154.37 4511.58,3154.37 6311.58,3154.37 8111.58,3154.37 9911.58,3154.37 11711.58,3154.37 13511.58,3154.37 2798.42,3174.6 4598.42,3174.6 6398.42,3174.6 8198.42,3174.6 9998.42,3174.6 11798.42,3174.6 13598.42,3174.6 2711.58,3179.37 4511.58,3179.37 6311.58,3179.37 8111.58,3179.37 9911.58,3179.37 11711.58,3179.37 13511.58,3179.37 2798.42,3199.6 4598.42,3199.6 6398.42,3199.6 8198.42,3199.6 9998.42,3199.6 11798.42,3199.6 13598.42,3199.6 2711.58,3204.37 4511.58,3204.37 6311.58,3204.37 8111.58,3204.37 9911.58,3204.37 11711.58,3204.37 13511.58,3204.37 2798.42,3224.6 4598.42,3224.6 6398.42,3224.6 8198.42,3224.6 9998.42,3224.6 11798.42,3224.6 13598.42,3224.6 2711.58,3229.37 4511.58,3229.37 6311.58,3229.37 8111.58,3229.37 9911.58,3229.37 11711.58,3229.37 13511.58,3229.37 2798.42,3249.6 4598.42,3249.6 6398.42,3249.6 8198.42,3249.6 9998.42,3249.6 11798.42,3249.6 13598.42,3249.6 2711.58,3254.37 4511.58,3254.37 6311.58,3254.37 8111.58,3254.37 9911.58,3254.37 11711.58,3254.37 13511.58,3254.37 2798.42,3274.6 4598.42,3274.6 6398.42,3274.6 8198.42,3274.6 9998.42,3274.6 11798.42,3274.6 13598.42,3274.6 2711.58,3279.37 4511.58,3279.37 6311.58,3279.37 8111.58,3279.37 9911.58,3279.37 11711.58,3279.37 13511.58,3279.37 2798.42,3299.6 4598.42,3299.6 6398.42,3299.6 8198.42,3299.6 9998.42,3299.6 11798.42,3299.6 13598.42,3299.6 2711.58,3304.37 4511.58,3304.37 6311.58,3304.37 8111.58,3304.37 9911.58,3304.37 11711.58,3304.37 13511.58,3304.37 2798.42,3324.6 4598.42,3324.6 6398.42,3324.6 8198.42,3324.6 9998.42,3324.6 11798.42,3324.6 13598.42,3324.6 2711.58,3329.37 4511.58,3329.37 6311.58,3329.37 8111.58,3329.37 9911.58,3329.37 11711.58,3329.37 13511.58,3329.37 2798.42,3349.6 4598.42,3349.6 6398.42,3349.6 8198.42,3349.6 9998.42,3349.6 11798.42,3349.6 13598.42,3349.6 2711.58,3354.37 4511.58,3354.37 6311.58,3354.37 8111.58,3354.37 9911.58,3354.37 11711.58,3354.37 13511.58,3354.37 2798.42,3374.6 4598.42,3374.6 6398.42,3374.6 8198.42,3374.6 9998.42,3374.6 11798.42,3374.6 13598.42,3374.6 2711.58,3379.37 4511.58,3379.37 6311.58,3379.37 8111.58,3379.37 9911.58,3379.37 11711.58,3379.37 13511.58,3379.37 2798.42,3399.6 4598.42,3399.6 6398.42,3399.6 8198.42,3399.6 9998.42,3399.6 11798.42,3399.6 13598.42,3399.6 2711.58,3404.37 4511.58,3404.37 6311.58,3404.37 8111.58,3404.37 9911.58,3404.37 11711.58,3404.37 13511.58,3404.37 2798.42,3424.6 4598.42,3424.6 6398.42,3424.6 8198.42,3424.6 9998.42,3424.6 11798.42,3424.6 13598.42,3424.6 2711.58,3429.37 4511.58,3429.37 6311.58,3429.37 8111.58,3429.37 9911.58,3429.37 11711.58,3429.37 13511.58,3429.37 2798.42,3449.6 4598.42,3449.6 6398.42,3449.6 8198.42,3449.6 9998.42,3449.6 11798.42,3449.6 13598.42,3449.6 2711.58,3454.37 4511.58,3454.37 6311.58,3454.37 8111.58,3454.37 9911.58,3454.37 11711.58,3454.37 13511.58,3454.37 2798.42,3474.6 4598.42,3474.6 6398.42,3474.6 8198.42,3474.6 9998.42,3474.6 11798.42,3474.6 13598.42,3474.6 2711.58,3479.37 4511.58,3479.37 6311.58,3479.37 8111.58,3479.37 9911.58,3479.37 11711.58,3479.37 13511.58,3479.37 2798.42,3499.6 4598.42,3499.6 6398.42,3499.6 8198.42,3499.6 9998.42,3499.6 11798.42,3499.6 13598.42,3499.6 2711.58,3504.37 4511.58,3504.37 6311.58,3504.37 8111.58,3504.37 9911.58,3504.37 11711.58,3504.37 13511.58,3504.37 2798.42,3524.6 4598.42,3524.6 6398.42,3524.6 8198.42,3524.6 9998.42,3524.6 11798.42,3524.6 13598.42,3524.6 2711.58,3529.37 4511.58,3529.37 6311.58,3529.37 8111.58,3529.37 9911.58,3529.37 11711.58,3529.37 13511.58,3529.37 2798.42,3549.6 4598.42,3549.6 6398.42,3549.6 8198.42,3549.6 9998.42,3549.6 11798.42,3549.6 13598.42,3549.6 2711.58,3554.37 4511.58,3554.37 6311.58,3554.37 8111.58,3554.37 9911.58,3554.37 11711.58,3554.37 13511.58,3554.37 2650,3570 2680,3570 4450,3570 4480,3570 6250,3570 6280,3570 8050,3570 8080,3570 9850,3570 9880,3570 11650,3570 11680,3570 13450,3570 13480,3570 2615,3575 2798.42,3574.6 4415,3575 4598.42,3574.6 6215,3575 6398.42,3574.6 8015,3575 8198.42,3574.6 9815,3575 9998.42,3574.6 11615,3575 11798.42,3574.6 13415,3575 13598.42,3574.6 2590,3585 4390,3585 6190,3585 7990,3585 9790,3585 11590,3585 13390,3585 2790,3600 4590,3600 6390,3600 8190,3600 9990,3600 11790,3600 13590,3600 2570,3605 4370,3605 6170,3605 7970,3605 9770,3605 11570,3605 13370,3605 2555,3625 2775,3625 4355,3625 4575,3625 6155,3625 6375,3625 7955,3625 8175,3625 9755,3625 9975,3625 11555,3625 11775,3625 13355,3625 13575,3625 2750,3645 4550,3645 6350,3645 8150,3645 9950,3645 11750,3645 13550,3645 2550,3650 4350,3650 6150,3650 7950,3650 9750,3650 11550,3650 13350,3650 2675,3655 2705,3655 4475,3655 4505,3655 6275,3655 6305,3655 8075,3655 8105,3655 9875,3655 9905,3655 11675,3655 11705,3655 13475,3655 13505,3655 2650,3662.6 6250,3662.6 9850,3662.6 13450,3662.6 7141.63,4016.7 14341.63,4016.7 7835,4025 9965,4025 3460.68,4026.63 10660.68,4026.63 7806.58,4033.3 9993.42,4036.54 7133.92,4040.49 14333.92,4040.49 3470.95,4049.42 10670.95,4049.42 7806.58,4058.3 7120.17,4061.37 14320.17,4061.37 9993.42,4061.54 3486.9,4068.67 10686.9,4068.67 7101.37,4077.84 14301.37,4077.84 3507.39,4082.99 7806.58,4083.3 10707.39,4082.99 9993.42,4086.54 7078.86,4088.72 14278.86,4088.72 3530.96,4091.32 10730.96,4091.32 3555.87,4093.42 3580.87,4093.42 3605.87,4093.42 3630.87,4093.42 3655.87,4093.42 3680.87,4093.42 3705.87,4093.42 3730.87,4093.42 3755.87,4093.42 3780.87,4093.42 3805.87,4093.42 3830.87,4093.42 3855.87,4093.42 3880.87,4093.42 3905.87,4093.42 3930.87,4093.42 3955.87,4093.42 3980.87,4093.42 4005.87,4093.42 4030.87,4093.42 4055.87,4093.42 4080.87,4093.42 4105.87,4093.42 4130.87,4093.42 4155.87,4093.42 4180.87,4093.42 4205.87,4093.42 4230.87,4093.42 4255.87,4093.42 4280.87,4093.42 4305.87,4093.42 4330.87,4093.42 6254.26,4093.41 6279.26,4093.41 6304.26,4093.41 6329.26,4093.41 6354.26,4093.41 6379.26,4093.41 6404.26,4093.41 6429.26,4093.41 6454.26,4093.41 6479.26,4093.41 6504.26,4093.41 6529.26,4093.41 6554.26,4093.41 6579.26,4093.41 6604.26,4093.41 6629.26,4093.41 6654.26,4093.41 6679.26,4093.41 6704.26,4093.41 6729.26,4093.41 6754.26,4093.41 6779.26,4093.41 6804.26,4093.41 6829.26,4093.41 6854.26,4093.41 6879.26,4093.41 6904.26,4093.41 6929.26,4093.41 6954.26,4093.41 6979.26,4093.41 7004.26,4093.41 7029.26,4093.41 7054.26,4093.17 10755.87,4093.42 10780.87,4093.42 10805.87,4093.42 10830.87,4093.42 10855.87,4093.42 10880.87,4093.42 10905.87,4093.42 10930.87,4093.42 10955.87,4093.42 10980.87,4093.42 11005.87,4093.42 11030.87,4093.42 11055.87,4093.42 11080.87,4093.42 11105.87,4093.42 11130.87,4093.42 11155.87,4093.42 11180.87,4093.42 11205.87,4093.42 11230.87,4093.42 11255.87,4093.42 11280.87,4093.42 11305.87,4093.42 11330.87,4093.42 11355.87,4093.42 11380.87,4093.42 11405.87,4093.42 11430.87,4093.42 11455.87,4093.42 11480.87,4093.42 11505.87,4093.42 11530.87,4093.42 13454.26,4093.42 13479.26,4093.42 13504.26,4093.42 13529.26,4093.42 13554.26,4093.42 13579.26,4093.42 13604.26,4093.42 13629.26,4093.42 13654.26,4093.42 13679.26,4093.42 13704.26,4093.42 13729.26,4093.42 13754.26,4093.42 13779.26,4093.42 13804.26,4093.42 13829.26,4093.42 13854.26,4093.42 13879.26,4093.42 13904.26,4093.42 13929.26,4093.42 13954.26,4093.42 13979.26,4093.42 14004.26,4093.42 14029.26,4093.42 14054.26,4093.42 14079.26,4093.42 14104.26,4093.42 14129.26,4093.42 14154.26,4093.42 14179.26,4093.42 14204.26,4093.42 14229.26,4093.42 14254.26,4093.17 7806.58,4108.3 9906.58,4110.68 9993.42,4111.54 7893.42,4113.93 7806.58,4133.3 9906.58,4135.68 9993.42,4136.54 7893.42,4138.93 7806.58,4158.3 9906.58,4160.68 9993.42,4161.54 7893.42,4163.93 7806.58,4183.3 9906.58,4185.68 9993.42,4186.54 7893.42,4188.93 7806.58,4208.3 9906.58,4210.68 9993.42,4211.54 7893.42,4213.93 7806.58,4233.3 9906.58,4235.68 9993.42,4236.54 7893.42,4238.93 7806.58,4258.3 9906.58,4260.68 9993.42,4261.54 7893.42,4263.93 7806.58,4283.3 9906.58,4285.68 9993.42,4286.54 7893.42,4288.93 7806.58,4308.3 9906.58,4310.68 9993.42,4311.54 7893.42,4313.93 7806.58,4333.3 9906.58,4335.68 9993.42,4336.54 7893.42,4338.93 7806.58,4358.3 9906.58,4360.68 9993.42,4361.54 7893.42,4363.93 7806.58,4383.3 9906.58,4385.68 9993.42,4386.54 7893.42,4388.93 7803.52,4408.12 9908.31,4410.62 9997.42,4411.22 7891.16,4413.83 7790.61,4429.53 10011.78,4431.69 9914.12,4434.93 7884.91,4438.04 7769.6,4443.07 10033.52,4444.02 6294.85,4446.58 6319.85,4446.58 6344.85,4446.58 6369.85,4446.58 6394.85,4446.58 6419.85,4446.58 6444.85,4446.58 6469.85,4446.58 6494.85,4446.58 6519.85,4446.58 6544.85,4446.58 6569.85,4446.58 6594.85,4446.58 6619.85,4446.58 6644.85,4446.58 6669.85,4446.58 6694.85,4446.58 6719.85,4446.58 6744.85,4446.58 6769.85,4446.58 6794.85,4446.58 6819.85,4446.58 6844.85,4446.58 6869.85,4446.58 6894.85,4446.58 6919.85,4446.58 6944.85,4446.58 6969.85,4446.58 6994.85,4446.58 7019.85,4446.58 7044.85,4446.58 7069.85,4446.58 7094.85,4446.58 7119.85,4446.58 7144.85,4446.58 7169.85,4446.58 7194.85,4446.58 7219.85,4446.58 7244.85,4446.58 7269.85,4446.58 7294.85,4446.58 7319.85,4446.58 7344.85,4446.58 7369.85,4446.58 7394.85,4446.58 7419.85,4446.58 7444.85,4446.58 7469.85,4446.58 7494.85,4446.58 7519.85,4446.58 7544.85,4446.58 7569.85,4446.58 7594.85,4446.58 7619.85,4446.58 7644.85,4446.58 7669.85,4446.58 7694.85,4446.58 7719.85,4446.58 7744.85,4446.58 10058.39,4446.58 10083.39,4446.58 10108.39,4446.58 10133.39,4446.58 10158.39,4446.58 10183.39,4446.58 10208.39,4446.58 10233.39,4446.58 10258.39,4446.58 10283.39,4446.58 10308.39,4446.58 10333.39,4446.58 10358.39,4446.58 10383.39,4446.58 10408.39,4446.58 10433.39,4446.58 10458.39,4446.58 10483.39,4446.58 10508.39,4446.58 10533.39,4446.58 10558.39,4446.58 10583.39,4446.58 10608.39,4446.58 10633.39,4446.58 10658.39,4446.58 10683.39,4446.58 10708.39,4446.58 10733.39,4446.58 10758.39,4446.58 10783.39,4446.58 10808.39,4446.58 10833.39,4446.58 10858.39,4446.58 10883.39,4446.58 10908.39,4446.58 10933.39,4446.58 10958.39,4446.58 10983.39,4446.58 11008.39,4446.58 11033.39,4446.58 11058.39,4446.58 11083.39,4446.58 11108.39,4446.58 11133.39,4446.58 11158.39,4446.58 11183.39,4446.58 11208.39,4446.58 11233.39,4446.58 11258.39,4446.58 11283.39,4446.58 11308.39,4446.58 11333.39,4446.58 11358.39,4446.58 11383.39,4446.58 11408.39,4446.58 11433.39,4446.58 11458.39,4446.58 11483.39,4446.58 11508.39,4446.58 9923.89,4457.95 12541.4,4458.49 7874.41,4460.72 5245,4465 5264.26,4476.11 9937.72,4478.77 7860.15,4481.26 12533.24,4482.12 9954.93,4496.9 5276.97,4497.64 7842.57,4499.03 12519.06,4502.71 9975.01,4511.8 7822.19,4513.51 5294.95,4515.01 12499.9,4518.77 9997.36,4523.01 7799.62,4524.26 5316.9,4526.98 12477.17,4529.18 10021.3,4530.2 7775.53,4530.96 5350.64,4533.42 5375.64,4533.42 5400.64,4533.42 5425.64,4533.42 5450.64,4533.42 5475.64,4533.42 5500.64,4533.42 5525.64,4533.42 5550.64,4533.42 5575.64,4533.42 5600.64,4533.42 5625.64,4533.42 5650.64,4533.42 5675.64,4533.42 5700.64,4533.42 5725.64,4533.42 5750.64,4533.42 5775.64,4533.42 5800.64,4533.42 5825.64,4533.42 5850.64,4533.42 5875.64,4533.42 5900.64,4533.42 5925.64,4533.42 5950.64,4533.42 5975.64,4533.42 6000.64,4533.42 6025.64,4533.42 6050.64,4533.42 6075.64,4533.42 6100.64,4533.42 6125.64,4533.42 6150.64,4533.42 6175.64,4533.42 6200.64,4533.42 6225.64,4533.42 6250.64,4533.42 6275.64,4533.42 6300.64,4533.42 6325.64,4533.42 6350.64,4533.42 6375.64,4533.42 6400.64,4533.42 6425.64,4533.42 6450.64,4533.42 6475.64,4533.42 6500.64,4533.42 6525.64,4533.42 6550.64,4533.42 6575.64,4533.42 6600.64,4533.42 6625.64,4533.42 6650.64,4533.42 6675.64,4533.42 6700.64,4533.42 6725.64,4533.42 6750.64,4533.42 6775.64,4533.42 6800.64,4533.42 6825.64,4533.42 6850.64,4533.42 6875.64,4533.42 6900.64,4533.42 6925.64,4533.42 6950.64,4533.42 6975.64,4533.42 7000.64,4533.42 7025.64,4533.42 7050.64,4533.42 7075.64,4533.42 7100.64,4533.42 7125.64,4533.42 7150.64,4533.42 7175.64,4533.42 7200.64,4533.42 7225.64,4533.42 7250.64,4533.42 7275.64,4533.42 7300.64,4533.42 7325.64,4533.42 7350.64,4533.42 7375.64,4533.42 7400.64,4533.42 7425.64,4533.42 7450.64,4533.42 7475.64,4533.42 7500.64,4533.42 7525.64,4533.42 7550.64,4533.42 7575.64,4533.42 7600.64,4533.42 7625.64,4533.42 7650.64,4533.42 7675.64,4533.42 7700.64,4533.42 7725.64,4533.42 7750.64,4533.33 10046.12,4533.17 10071.12,4533.42 10096.12,4533.42 10121.12,4533.42 10146.12,4533.42 10171.12,4533.42 10196.12,4533.42 10221.12,4533.42 10246.12,4533.42 10271.12,4533.42 10296.12,4533.42 10321.12,4533.42 10346.12,4533.42 10371.12,4533.42 10396.12,4533.42 10421.12,4533.42 10446.12,4533.42 10471.12,4533.42 10496.12,4533.42 10521.12,4533.42 10546.12,4533.42 10571.12,4533.42 10596.12,4533.42 10621.12,4533.42 10646.12,4533.42 10671.12,4533.42 10696.12,4533.42 10721.12,4533.42 10746.12,4533.42 10771.12,4533.42 10796.12,4533.42 10821.12,4533.42 10846.12,4533.42 10871.12,4533.42 10896.12,4533.42 10921.12,4533.42 10946.12,4533.42 10971.12,4533.42 10996.12,4533.42 11021.12,4533.42 11046.12,4533.42 11071.12,4533.42 11096.12,4533.42 11121.12,4533.42 11146.12,4533.42 11171.12,4533.42 11196.12,4533.42 11221.12,4533.42 11246.12,4533.42 11271.12,4533.42 11296.12,4533.42 11321.12,4533.42 11346.12,4533.42 11371.12,4533.42 11396.12,4533.42 11421.12,4533.42 11446.12,4533.42 11471.12,4533.42 11496.12,4533.42 11521.12,4533.42 11546.12,4533.42 11571.12,4533.42 11596.12,4533.42 11621.12,4533.42 11646.12,4533.42 11671.12,4533.42 11696.12,4533.42 11721.12,4533.42 11746.12,4533.42 11771.12,4533.42 11796.12,4533.42 11821.12,4533.42 11846.12,4533.42 11871.12,4533.42 11896.12,4533.42 11921.12,4533.42 11946.12,4533.42 11971.12,4533.42 11996.12,4533.42 12021.12,4533.42 12046.12,4533.42 12071.12,4533.42 12096.12,4533.42 12121.12,4533.42 12146.12,4533.42 12171.12,4533.42 12196.12,4533.42 12221.12,4533.42 12246.12,4533.42 12271.12,4533.42 12296.12,4533.42 12321.12,4533.42 12346.12,4533.42 12371.12,4533.42 12396.12,4533.42 12421.12,4533.42 12452.49,4533.17